# Altium PCB MSE312_SIMRACER.PcbDoc
Units mm, origin at the board's own origin, x right, y up, seen from the top; angles counter-clockwise.
Board outline 100 x 80 mm, 2 copper layers (Top Layer, Bottom Layer); 42 components, 49 nets, 186 pads, 23 vias.
Unrouted connection lines stored in the file: 2.
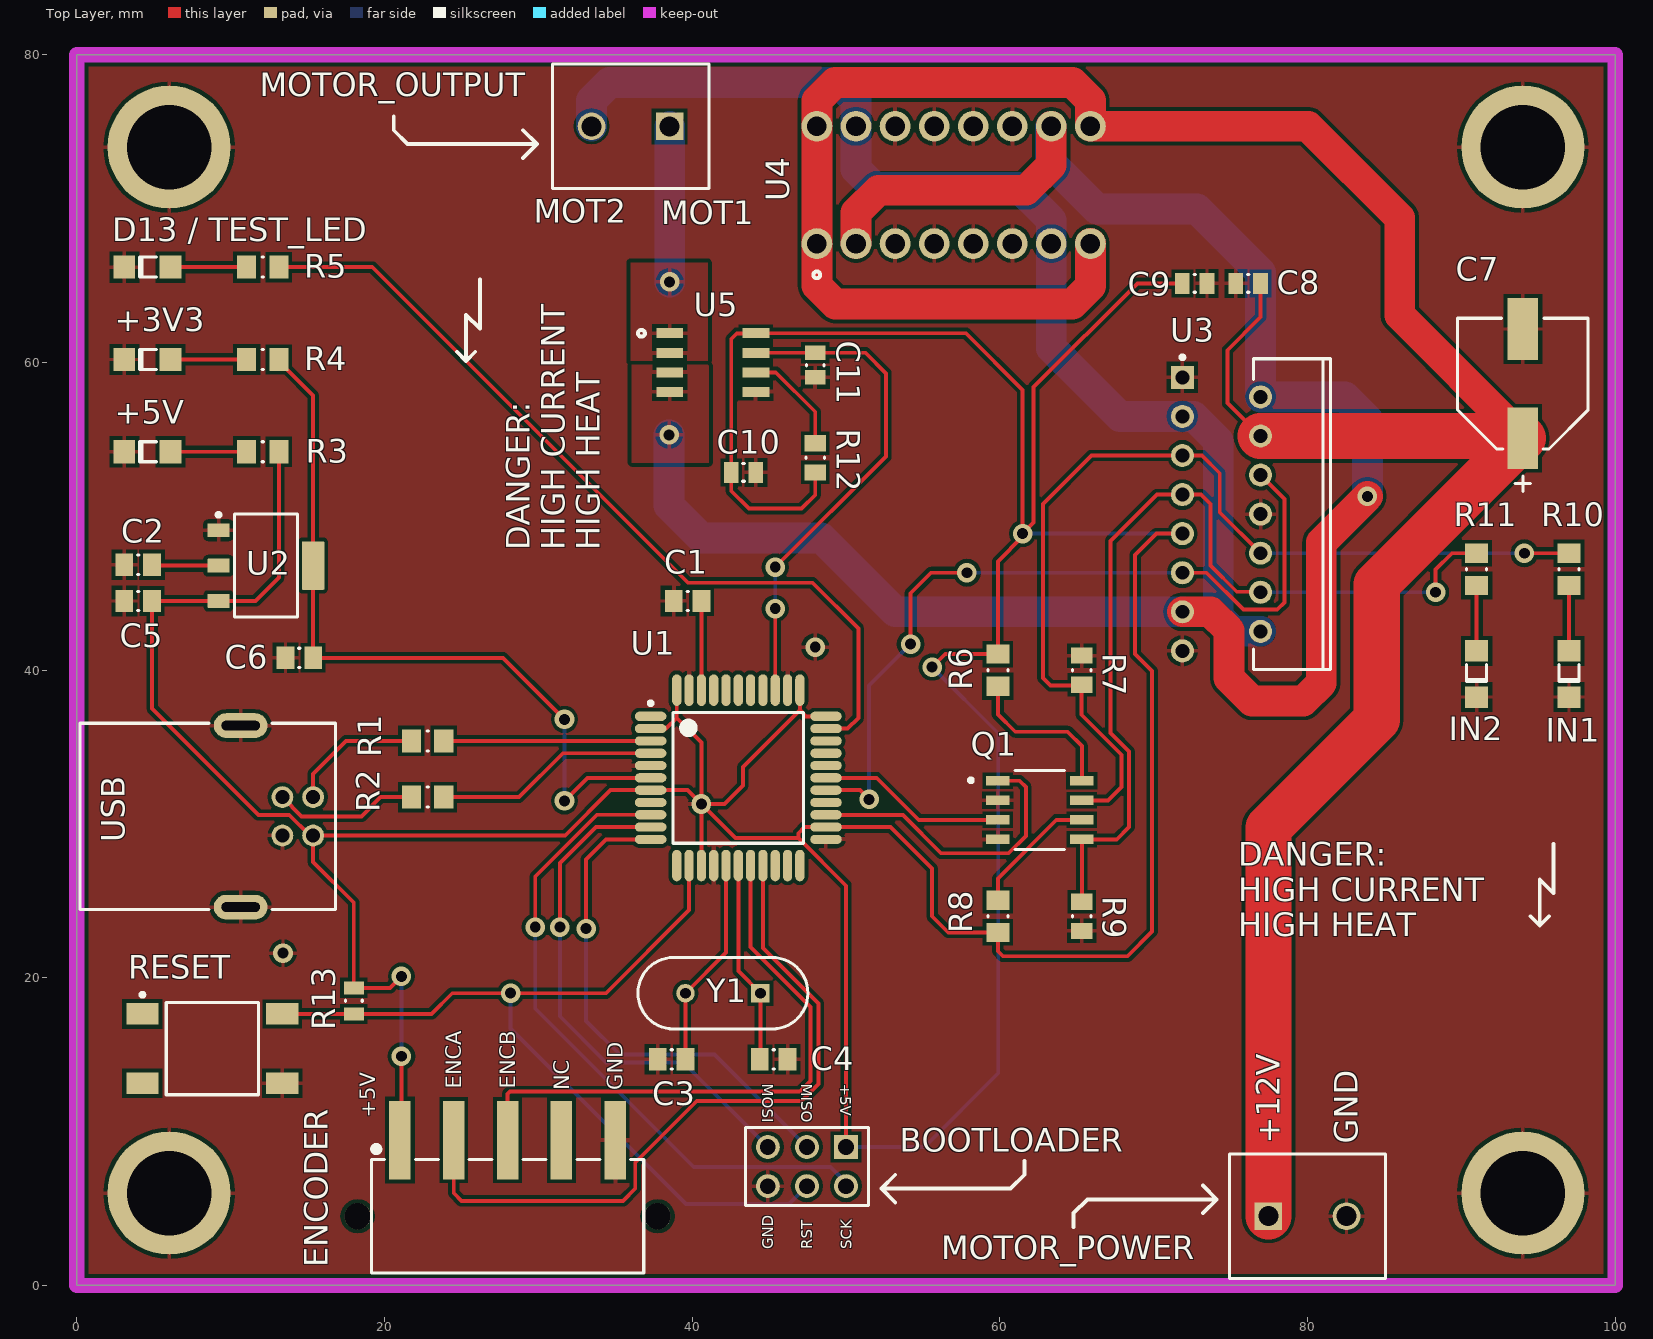
[diagram p0: Top Layer view]
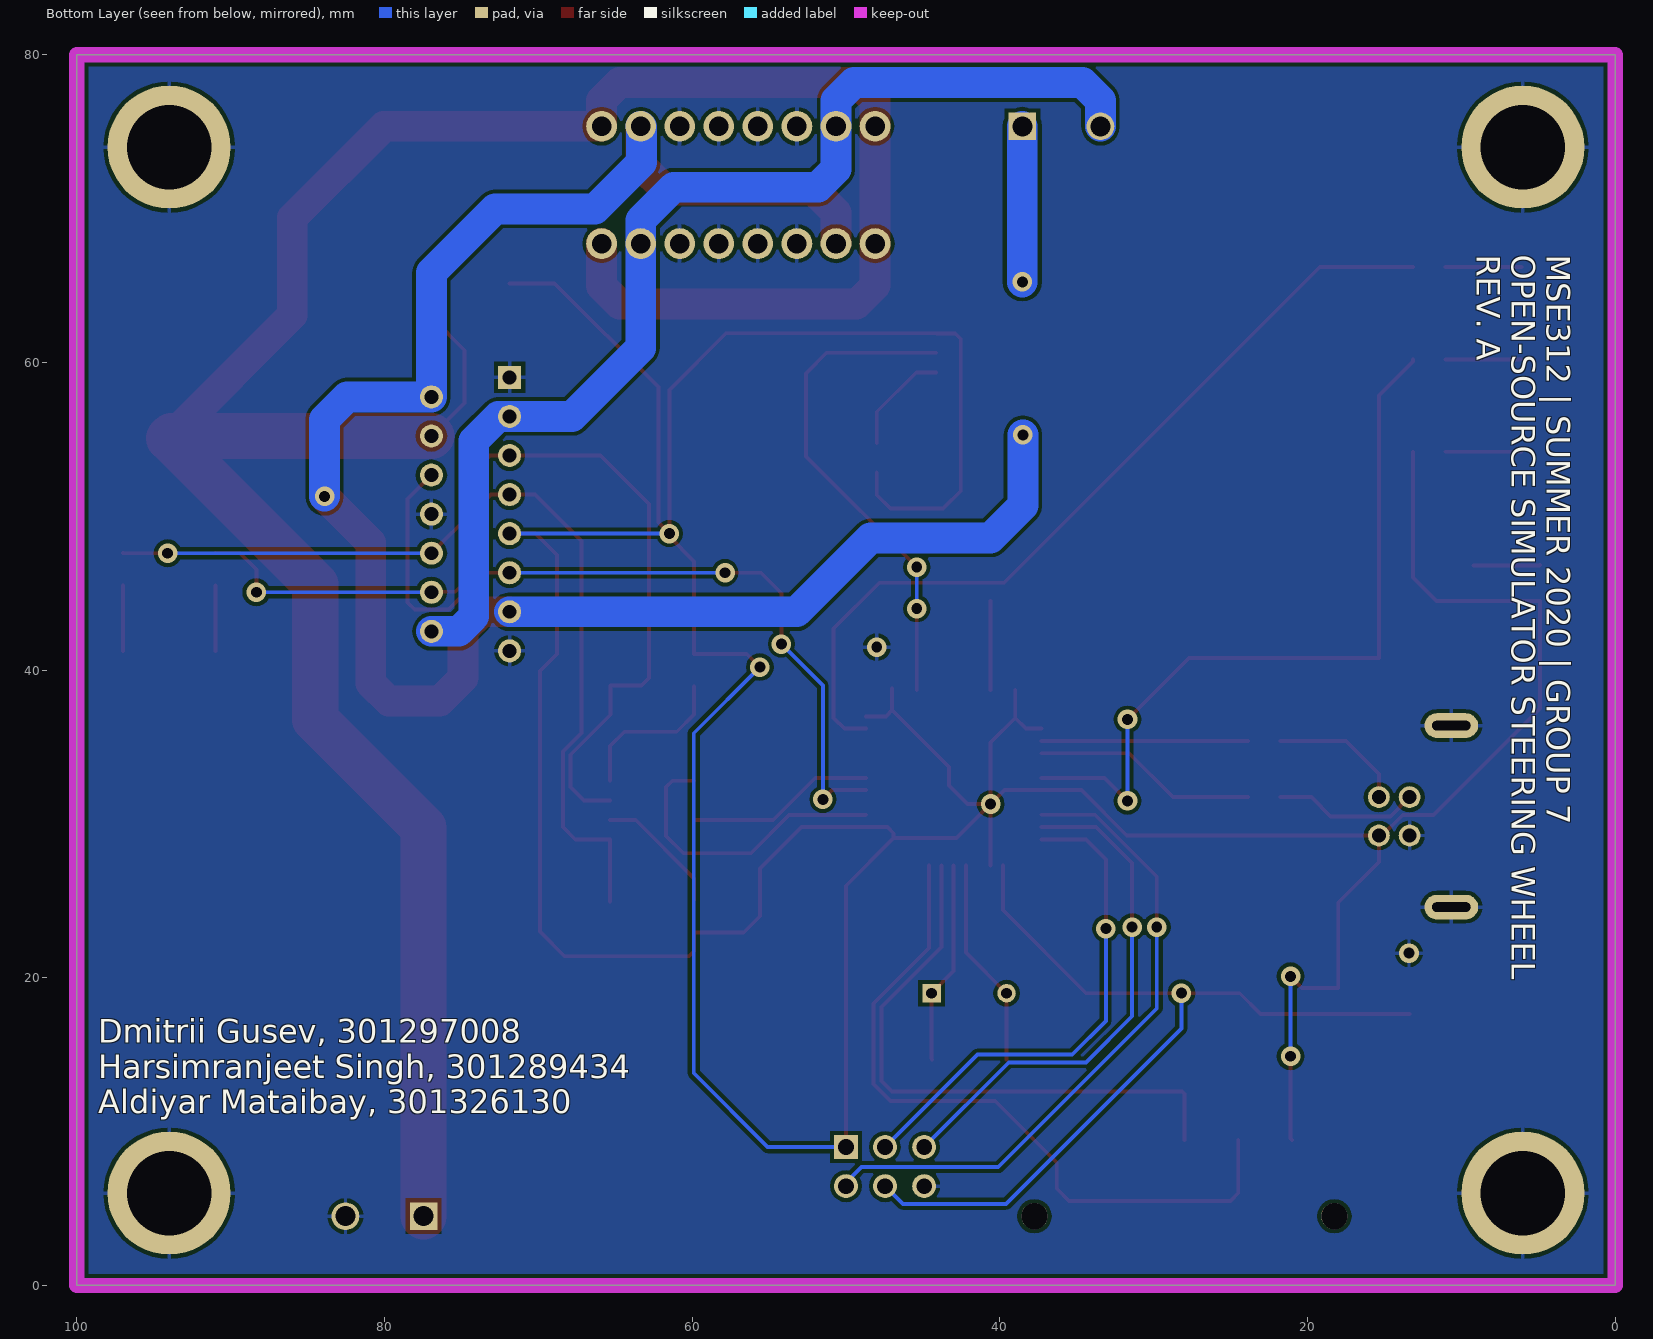
[diagram p1: Bottom Layer view, seen from below]

## Layer stack, top to bottom
Top Solder: solder mask 0.0102, Solder Resist, Dk 3.5
Top Layer: signal copper 0.0356
Dielectric 1: dielectric 0.32, FR-4, Dk 4.8
Bottom Layer: signal copper 0.0356
Bottom Solder: solder mask 0.0102, Solder Resist, Dk 3.5

## Board outline
0,0 100,0 100,80 0,80

## Design rules (kind name [scope] priority, off if disabled: settings)
Clearance [All] p1: gap=0.254 ignorepadtopadclearanceinfootprint=FALSE except(0: Arc-Hole Track-Hole SMDPad-Hole THPad-Hole Via-Hole Fill-Hole Poly-Hole Region-Hole Text-Hole)
ComponentClearance [All] p1: gap=0 collisioncheckmode=3 verticalgap=0 showdistances=FALSE
PolygonConnect [All] p1: connectstyle=Relief reliefconductorwidth=0.254 reliefentries=4 polygonreliefangle="90 Angle" airgapwidth=0.254
RoutingVias [All] p1: holewidth=0.711 width=1.27 viastyle="Through Hole" minholewidth=0.711 minwidth=1.27 maxholewidth=0.711 maxwidth=1.27
SolderMaskExpansion [All] p1: expansion=0.102
Width [All] p1: maxlimit=3 minlimit=0.127 preferedwidth=0.254 minimp=50.000000 maximp=50.000000 favimp=50.000000
29 further rules are at their usual default settings.

## Classes and differential pairs
component class MSE312_SIMRACER: +3V3 +5V BOOTLOADER C1 C2 C3 C4 C5 C6 "D13 / TEST_LED" ENCODER MOTOR_POWER Q1 R1 R2 R3 R4 R5 R6 R7 R8 R9 R13 RESET U1 U2 USB Y1
component class L298N: C7 C8 C9 C10 C11 IN1 IN2 MOTOR_OUTPUT R10 R11 R12 U3 U4 U5

## Components (designator, comment, footprint, x,y, rotation, side; value= is the part's Value field where it differs from the comment)
+3V3 "150120GS75000" 1206_A 4.585,60.2 r0 top
+5V "150120GS75000" 1206_A 4.585,54.2 r0 top
BOOTLOADER "TSW-103-08-G-D" SMTC-TSW-103-08-X-D 50,9 r180 top
C1 "1uF 6.3V 0805(2012)" CAPC0805(2012)145_N 39.7,44.5 r0 top value=1uF
C2 "1uF 6.3V 0805(2012)" CAPC0805(2012)145_N 3.985,46.85 r0 top value=1uF
C3 "22pF 16V 0805(2012)" CAPC0805(2012)100_N 38.66,14.7 r0 top value=22pF
C4 "22pF 16V 0805(2012)" CAPC0805(2012)100_N 45.3,14.7 r180 top value=22pF
C5 "10uF 25V 0805(2012)" CAPC0805(2012)145_N 3.985,44.5 r0 top value=10uF
C6 "10uF 25V 0805(2012)" CAPC0805(2012)145_N 14.46,40.8 r0 top value=10uF
C7 "EEE-FK1H101P" FP-EEE-FK1H101P-MFG 94,58.63 r270 top value=100uF
C8 "100nF 16V 0805(2012)" CAPC0805(2012)100_L 76.15,65.145 r180 top value=100nF
C9 "100nF 16V 0805(2012)" CAPC0805(2012)100_L 72.67,65.145 r180 top value=100nF
C10 "100nF 16V 0805(2012)" CAPC0805(2012)100_L 43.34,52.855 r180 top value=100nF
C11 "1nF 200V 0805(2012)" CAPC0805(2012)145_L 48,59.835 r90 top value=1nF
"D13 / TEST_LED" "150120GS75000" 1206_A 4.585,66.2 r0 top
ENCODER "691508110305" 691508110305 28,4.5 r0 top
IN1 "150120BS75000" 1206_A 97,39.755 r90 top
IN2 "150120BS75000" 1206_A 91,39.755 r90 top
MOTOR_OUTPUT "1729128" PHOE-1729128-2_V 36,75.355 r180 top
MOTOR_POWER "1729128" PHOE-1729128-2_V 80,4.5 r0 top
Q1 "MOCD213R2M" FP-751DZ-MFG 62.6,30.905 r0 top
R1 "22R 5% 0805(2012)" RESC0805(2012)_M 22.8,35.4 r0 top value="22.00 Ohm"
R2 "22R 5% 0805(2012)" RESC0805(2012)_M 22.8,31.75 r0 top value="22.00 Ohm"
R3 "1K 1% 0805(2012)" RESC0805(2012)_M 12.085,54.2 r0 top value="1000.00 Ohm"
R4 "1K 1% 0805(2012)" RESC0805(2012)_M 12.085,60.2 r0 top value="1000.00 Ohm"
R5 "1K 1% 0805(2012)" RESC0805(2012)_M 12.085,66.2 r0 top value="1000.00 Ohm"
R6 "1K 1% 0805(2012)" RESC0805(2012)_M 59.87,40 r90 top value="1000.00 Ohm"
R7 "4K7 5% 0805(2012)" RESC0805(2012)_N 65.33,40 r270 top value="4700.00 Ohm"
R8 "1K 1% 0805(2012)" RESC0805(2012)_M 59.87,24 r270 top value="1000.00 Ohm"
R9 "4K7 5% 0805(2012)" RESC0805(2012)_N 65.33,24 r90 top value="4700.00 Ohm"
R10 "1K 1% 0805(2012)" RESC0805(2012)_M 97,46.555 r90 top value="1000.00 Ohm"
R11 "1K 1% 0805(2012)" RESC0805(2012)_M 91,46.555 r90 top value="1000.00 Ohm"
R12 "4K7 5% 0805(2012)" RESC0805(2012)_N 48,53.805 r270 top value="4700.00 Ohm"
R13 "10K 5% 0805(2012)" RESC0805(2012)_L 18,18.5 r90 top value="10000.00 Ohm"
RESET "FSM4JSMATR" TECO-FSM4JSMATR_V 8.81,15.4 r90 top
U1 "ATmega32U4-AU" 44ML_M 43,33 r0 top
U2 "LM1117MP-3.3/NOPB" DCY0004A_L 12.285,46.8 r0 top
U3 "L298N" STM-FM-15 74.41,50.145 r0 top
U4 "L6210" L6210 57,71.545 r90 top
U5 "ACS723" ACS723 41.34,60 r0 top
USB "61410416121R" 61410416121R 8.5,30.5 r270 top
Y1 "49S/18PF" JPY-49S-18PF 42,19 r180 top

## Footprints (in the part's own frame and the unit in brackets; to place one, negate y for a bottom-side part, rotate by r counter-clockwise, add the part's x,y. Pads: shape width x height; smd on the part's side, far side on the other; paste and mask are expansions set on the pad)
44ML_M [mm] "Thin QFP, 44-Leads, Body 10x10mm, Pitch 0.8mm, IPC Low Density"
  oval 2.05x0.6 smd: 1(-5.7,4) 2(-5.7,3.2) 3(-5.7,2.4) 4(-5.7,1.6) 5(-5.7,0.8) 6(-5.7,0) 7(-5.7,-0.8) 8(-5.7,-1.6) 9(-5.7,-2.4) 10(-5.7,-3.2) 11(-5.7,-4) 23(5.7,-4) 24(5.7,-3.2) 25(5.7,-2.4) 26(5.7,-1.6) 27(5.7,-0.8) 28(5.7,0) 29(5.7,0.8) 30(5.7,1.6) 31(5.7,2.4) 32(5.7,3.2) 33(5.7,4)
  oval 0.6x2.05 smd: 12(-4,-5.7) 13(-3.2,-5.7) 14(-2.4,-5.7) 15(-1.6,-5.7) 16(-0.8,-5.7) 17(0,-5.7) 18(0.8,-5.7) 19(1.6,-5.7) 20(2.4,-5.7) 21(3.2,-5.7) 22(4,-5.7) 34(4,5.7) 35(3.2,5.7) 36(2.4,5.7) 37(1.6,5.7) 38(0.8,5.7) 39(0,5.7) 40(-0.8,5.7) 41(-1.6,5.7) 42(-2.4,5.7) 43(-3.2,5.7) 44(-4,5.7)
  silkscreen extent -5.82,-4.25 4.25,4.97, body extent -5,-5 5,5, height 1.2
1206_A [mm] "Chip LED, 2-Leads, Body 3.2x1.6mm, IPC Medium Density"
  rect 1.4x1.5 smd: 1(-1.5,0) 2(1.5,0)
  silkscreen extent -0.5,-0.66 0.6,0.65, body extent -1.6,-0.8 1.6,0.8, height 0.68
61410416121R [mm] "USB Type B Horizontal THR"
  round 1.42 hole 0.92: 1(1.25,6.86) 2(-1.25,6.86) 3(-1.25,4.86) 4(1.25,4.86)
  oval 1.6x3.5 hole 0.6 slot 2.5 at 90 deg: Shell(-5.9,2.15) Shell(5.9,2.15)
  silkscreen extent -6.05,-8.3 6.05,8.3, body extent -6.2,-8.3 6.2,8.3, height 11.05
691508110305 [mm] "WR-TBL Terminal block - serie 5081 3,50mm - SMT - Horizontal entry with rising clamp - 05p"
  rect 1.4x5.1 smd: 1(-7,4.95) 2(-3.5,4.95) 3(0,4.95) 4(3.5,4.95) 5(7,4.95)
  round 1.7 hole 1.7 unplated: M1(-9.75,0) M2(9.75,0)
  silkscreen extent -8.85,-3.7 8.85,4.51, body extent -10.42,-3.7 10.42,7.2, height 11.25
ACS723 [mm]
  rect 1.75x0.65 smd: 1(-2.8,1.905) 2(-2.8,0.635) 3(-2.8,-0.635) 4(-2.8,-1.905) 5(2.8,-1.905) 6(2.8,-0.635) 7(2.8,0.635) 8(2.8,1.905)
  body extent -3.1,-2.5 3.1,2.5, height 2
CAPC0805(2012)100_L [mm] "Chip Capacitor, Body 2.0x1.2mm, Height 1.0mm, IPC High Density"
  rect 0.95x1.35 smd: 1(-0.8,0) 2(0.8,0)
  silkscreen extent -0.05,-0.58 0.05,0.58, body extent -1.1,-0.72 1.1,0.72, height 1
CAPC0805(2012)100_N [mm] "Chip Capacitor, Body 2.0x1.2mm, Height 1.0mm, IPC Medium Density"
  rect 1.15x1.45 smd: 1(-0.9,0) 2(0.9,0)
  silkscreen extent -0.05,-0.62 0.05,0.63, body extent -1.1,-0.72 1.1,0.73, height 1
CAPC0805(2012)145_L [mm] "Chip Capacitor, Body 2.0x1.2mm, Height 1.45mm, IPC High Density"
  rect 0.95x1.35 smd: 1(-0.8,0) 2(0.8,0)
  silkscreen extent -0.05,-0.58 0.05,0.58, body extent -1.1,-0.72 1.1,0.72, height 1.45
CAPC0805(2012)145_N [mm] "Chip Capacitor, Body 2.0x1.2mm, Height 1.45mm, IPC Medium Density"
  rect 1.15x1.45 smd: 1(-0.9,0) 2(0.9,0)
  silkscreen extent -0.05,-0.62 0.05,0.63, body extent -1.1,-0.72 1.1,0.73, height 1.45
DCY0004A_L [mm] "SOT223, 4-Leads, Body 6.7x3.7mm, Pitch 2.3mm, IPC High Density"
  rrect11% 1.45x0.9 smd: 1(-3.075,2.3) 2(-3.075,0) 3(-3.075,-2.3)
  rrect7% 1.45x3.15 smd: 4(3.075,0)
  silkscreen extent -3.2,-3.35 2.05,3.42, body extent -3.5,-3.25 3.5,3.25, height 1.62
FP-751DZ-MFG [mm]
  rect 1.52x0.61 smd paste+0 mask+0: 1(-2.73,1.905) 2(-2.73,0.635) 3(-2.73,-0.635) 4(-2.73,-1.905) 5(2.73,-1.905) 6(2.73,-0.635) 7(2.73,0.635) 8(2.73,1.905)
  silkscreen extent -4.6,-2.57 1.6,2.57, body extent -3.59,-2.67 3.59,2.67, height 0.25
FP-EEE-FK1H101P-MFG [mm]
  rect 4x2 smd paste+0 mask+0: 1(-3.55,0) 2(3.55,0)
  silkscreen extent -4.25,-4.25 7,4.25, body extent -5.8,-4.5 5.8,4.5, height 0.25
JPY-49S-18PF [mm] "THD, 2-Leads, Body 11.05x4.65mm, Pitch 4.88mm"
  rect 1.2x1.2 hole 0.7: 1(-2.44,0)
  round 1.2 hole 0.7: 2(2.44,0)
  silkscreen extent -5.53,-2.32 5.53,2.32, body extent -5.52,-2.32 5.53,2.33, height 3.5
L6210 [mm] "SHOTTKY DIODE 4-CHANNEL BRIDGE"
  round 2 hole 1.27: 1(-3.81,8.89) 2(-3.81,6.35) 3(-3.81,3.81) 4(-3.81,1.27) 5(-3.81,-1.27) 6(-3.81,-3.81) 7(-3.81,-6.35) 8(-3.81,-8.89) 9(3.81,-8.89) 10(3.81,-6.35) 11(3.81,-3.81) 12(3.81,-1.27) 13(3.81,1.27) 14(3.81,3.81) 15(3.81,6.35) 16(3.81,8.89)
  body extent -4.13,-9.53 3.87,9.48, height 4
PHOE-1729128-2_V [mm] "Receptacle, 2-Leads, Body 8.1x10.16mm, Pitch 5.08mm"
  rect 1.8x1.8 hole 1.3: 1(-2.54,0)
  round 1.8 hole 1.3: 2(2.54,0)
  silkscreen extent -5.08,-4.05 5.08,4.05, body extent -5.65,-4.05 5.08,4.05, height 10.01
RESC0805(2012)_L [mm] "Chip Resistor, Body 2.0x1.3mm, IPC High Density"
  rect 0.85x1.3 smd: 1(-0.85,0) 2(0.85,0)
  silkscreen extent -0.05,-0.55 0.05,0.55, body extent -1.1,-0.67 1.1,0.68, height 0.7
RESC0805(2012)_M [mm] "Chip Resistor, Body 2.0x1.3mm, IPC Low Density"
  rect 1.25x1.5 smd: 1(-1.05,0) 2(1.05,0)
  silkscreen extent -0.05,-0.65 0.05,0.65, body extent -1.1,-0.67 1.1,0.67, height 0.7
RESC0805(2012)_N [mm] "Chip Resistor, Body 2.0x1.3mm, IPC Medium Density"
  rect 1.05x1.4 smd: 1(-0.95,0) 2(0.95,0)
  silkscreen extent -0.05,-0.6 0.05,0.6, body extent -1.1,-0.67 1.1,0.68, height 0.7
SMTC-TSW-103-08-X-D [mm] ".025 SQ Post Terminal Strip Assembly, 2x3 Pins, Vertical, 2.54mm Pitch, Male"
  rect 1.55x1.55 hole 1.02: 1(0,0)
  round 1.55 hole 1.02: 2(0,2.54) 3(2.54,0) 4(2.54,2.54) 5(5.08,0) 6(5.08,2.54)
  silkscreen extent -1.46,-1.27 6.54,3.81, body extent -1.27,-1.27 6.35,3.81, height 8.38
STM-FM-15 [mm] "FM, 15-Leads, Body 20.2x5mm, Pitch 1.27mm"
  rect 1.5x1.5 hole 0.9: 1(-2.54,8.89)
  round 1.5 hole 0.9: 2(2.54,7.62) 3(-2.54,6.35) 4(2.54,5.08) 5(-2.54,3.81) 6(2.54,2.54) 7(-2.54,1.27) 8(2.54,0) 9(-2.54,-1.27) 10(2.54,-2.54) 11(-2.54,-3.81) 12(2.54,-5.08) 13(-2.54,-6.35) 14(2.54,-7.62) 15(-2.54,-8.89)
  silkscreen extent -2.66,-10.1 7.09,10.31, body extent -2.8,-10.1 7.09,10.1, height 21
TECO-FSM4JSMATR_V [mm] "SMD, 4-Leads, Body 6x6mm, Pitch 4.5mm"
  rect 1.4x2.1 smd: 1(2.25,4.55) 2(2.25,-4.55) 3(-2.25,4.55) 4(-2.25,-4.55)
  silkscreen extent -3,-3 3.62,4.67, body extent -3,-5 3,5, height 5.08

## Part data
+3V3 +5V "D13 / TEST_LED": library part CMP-1426-00014-1, "SMD mono-color Chip LED, WL-SMCW, Green", Color=Green, Manufacturer="Wuerth Elektronik", ComponentLink1Description="Manufacturer URL", ComponentLink1URL=http://www.we-online.com, ComponentLink2Description=Datasheet, ComponentLink2URL=http://katalog.we-online.com/led/datasheet/150120GS75000.pdf, PackageReference=1206_A, PartNumber=150120GS75000
BOOTLOADER: library part CMP-1024-00338-1, Manufacturer=Samtec, Temperature Range="-55 to 125 degC", ComponentLink1Description="Manufacturer URL", ComponentLink1URL=http://www.samtec.com, ComponentLink2Description=Datasheet, ComponentLink2URL=http://www.samtec.com/documents/webfiles/pdf/TSW_TH.PDF, ComponentLink3Description="Package Specification", ComponentLink3URL=http://www.samtec.com/documents/webfiles/cpdf/TSW-XXX-XX-XXX-X-XX-XXX-MKT.pdf, DatasheetVersion=F-214, Mounting Technology=Through-hole, Orientation=Vertical, PackageDescription=".025[0.64] SQ. Post Terminal Strip Assembly", PackageReference=TSW-103-08-X-D, PackageVersion="DM, 8/1988", PartNumber=TSW-103-08-G-D, Pitch="2.54 mm", RoHS=True
C1 C2: library part CMP-1036-04731-1, "CAP 1uF 6.3V ±10% 0805 (2012 Metric) Thickness 1.45mm SMD", Case-EIA=0805, Case-Metric=2012, Rated Voltage="6.3 V", Tolerance=±10%, Max Thickness="1.45 mm", Technology=SMT
C3 C4: library part CMP-1036-01215-1, "CAP 22pF 16V ±0.5pF 0805 (2012 Metric) Thickness 1mm SMD", Case-EIA=0805, Case-Metric=2012, Rated Voltage="16 V", Tolerance=±0.5pF, Max Thickness="1 mm", Technology=SMT
C5 C6: library part CMP-1036-04932-1, "CAP 10uF 25V ±10% 0805 (2012 Metric) Thickness 1.45mm SMD", Case-EIA=0805, Case-Metric=2012, Rated Voltage="25 V", Tolerance=±10%, Max Thickness="1.45 mm", Technology=SMT
C7: library part CMP-05427-000005-1, "CAP ALUM 100UF 20% 50V SMD", Capacitance=100uF, Leakage Current=50uA, Manufacturer="Panasonic Electronic Components", Package=0, Ripple Current=350mA, Temperature="-55°C to +105°C", Temperature Range High=+105°C, Temperature Range Low=-55°C, Tolerance=20%, Voltage Rating=50V, Automotive=Yes, Automotive Grade="Grade 2", Category=Cap, ComponentLink2Description=Datasheet, ComponentLink2URL=https://industrial.panasonic.com/cdbs/www-data/pdf/RDE0000/ABA0000C1181.pdf, Device Class L1="Passive Components", Device Class L2=Capacitors, Device Class L3="Aluminum Electrolytic Capacitors", Digikey Description="CAP ALUM 100UF 20% 50V SMD", Dissipation Factor=10%, Esr=0.34O, Height=10.5mm, Lead Free=Yes, Life=2000Hours, Manufacturer Part Number=EEE-FK1H101P, Material=Aluminum, Mouser Description="Cap Aluminum Lytic 100uF 50V 20% (8 X 10.2mm) SMD 350mA 2000h 105C Automotive T/R", Octopart=https://octopart.com/eeefk1h101p-panasonic-4642841, RoHS=TRUE
C8 C9 C10: library part CMP-1036-04400-1, "CAP 100nF 16V ±5% 0805 (2012 Metric) Thickness 1mm SMD", Case-EIA=0805, Case-Metric=2012, Rated Voltage="16 V", Tolerance=±5%, Max Thickness="1 mm", Technology=SMT
C11: library part CMP-1036-02999-1, "CAP 1nF 200V ±10% 0805 (2012 Metric) Thickness 1.45mm SMD", Case-EIA=0805, Case-Metric=2012, Rated Voltage="200 V", Tolerance=±10%, Max Thickness="1.45 mm", Technology=SMT
ENCODER: library part CMP-1502-02493-1, "Serie 5081 - 3.50 mm Horizontal Entry SMT with Rising Cage Clamp WR-TBL, 5 pin", Manufacturer="Wurth Elektronik", Operating Temperature=-40to130degC, Datasheet URL=http://katalog.we-online.de/em/datasheet/6915081103xx.pdf, Manufacturer URL=http://www.we-online.de, Mounting Technology=SMT, Package Reference=691508110305, Packaging=TapeandReelwithCap, Part Number=691508110305, Pin Number=5, Pitch=3.50mm, Publisher=WurthElektronik
IN1 IN2: library part CMP-1426-00015-1, "SMD mono-color Chip LED, WL-SMCW, Blue", Color=Blue, Manufacturer="Wuerth Elektronik", ComponentLink1Description="Manufacturer URL", ComponentLink1URL=http://www.we-online.com, ComponentLink2Description=Datasheet, ComponentLink2URL=http://katalog.we-online.com/led/datasheet/150120BS75000.pdf, PackageReference=1206_A, PartNumber=150120BS75000
MOTOR_OUTPUT MOTOR_POWER: library part CMP-2000-05815-1, "PCB Terminal Block, 13.5 A, 400 V, 2-Pin THD, RoHS, Bulk", Current Rating=13500mA, Manufacturer="Phoenix Contact", Package Description="2-Pin Through Hole Device, Body 8.1 x 10.16 mm, Pitch 5.08 mm", Package Reference=1729128-2, Package Version=03/2015, Voltage Rating=400V, Datasheet URL=https://datasheet.ciiva.com/16046/1729128-16046181.pdf, Datasheet Version=12/2013, Manufacturer URL=http://www.phoenixcontact.com/, Mounting Technology=ThroughHole, No. of Positions=2, No. of Rows=1, Orientation=Horizontal, Package URL=https://www.phoenixcontact.com/online/portal/pi/pxc/product_detail_page/!ut/p/b1/3VdJjqNKFDxLH8AFycySyWY2ozFsEPOMMQaDOX1XedGL_1Vdm5YXJleknhSKeBkvI6EA8ncAo3AYoDhBQGco6KN7VURTdemj9us_IEKEZo_YHiPAEWEFmDGOHMORkqKYCORBZxgL7ZoaZYcbFFUZ3fqxSY6GOuxydWUuHqz1ynmMFygu583Bob0Ewr6Sd_l-5m-kAueHiB0jpRwZwe58wwtkpxtMYd_LmGcDRU02dRNEyWt6Y2ti5pSyJ_reIkzIulrqApdnbT11V5jnCKbYNCvhEM1MCpPByat_X379-iThf08CI5GfOPqfBeS3BRoBOdD55AKVv0iLwCMq-2BrzXWSGRH7pUGD9uwXQjiph3xL0DKQwdGa0JImiIOmBNOestqgwTHSSs2oOep-78apyXQBvNi8ZLaFjvjWvcaUEBu0MC6Wbe-d6mB0FAebo2lUWinqYaZs5DAYzV0RP9yitUjnGJ0iI9xhZkT42OCQNUJJhkgWINNQLP2JFP6OpMg3JCVg70jqHT0lvKOnhHf0lPuOnnLf0VPuWx6_dxwUIvwk5WMkT0kLL1mh61l2yZVSzG3pYV_bqo-mj6uMKwKwdnnW8Jh5RTOJzMOA5c-eJDaZQw4mTMPH02PvS_ZAqNVjVTo2WyYLkwH_KU1mmmG5kjRhDqPXLwwVHvVOjCM60-fpXvTDfMGW1PVFVS1r4e4yVDk4ZdNbkUHvqPqQSeian4UD39fNKmachqdJ1NJbyk8rXT9mXTvPk3oE5meulKGgiruPJek-4I9hTT6G8ZLOyRSm2RRVbThERQad5OS28hdt4YW4vG0stgYYzsWsK4_7y6DZMjJSCqri1kyiZR5vD7pwIrNR7QwPHTcLTI5qT7eRlpHrdGiupYlqQDJ7zy_CND8fWWBoLRXxk1RVcXiBQwbTD4Xi7KL-FuO94t9xaqweXzH, Packing=Bulk, PartNumber=1729128, Pitch=5.08mm, RoHS=TRUE
Q1: library part CMP-07144-000004-1, "OPTOISO 2.5KV 2CH TRANS 8SOIC", Ambient Temperature Range High=+100°C, Ambient Temperature Range Low=-40°C, Collector Emitter Voltage=70V, Emiiter Collector Voltage=7V, Forward Current=10mA, Forward Voltage=1.15V, Isolation Voltage=2500Vrms, Manufacturer="ON Semiconductor", Max Junction Temp=+125°C, Min Current Transfer Ratio=100%, Package=751DZ, Power Dissipation=240mW, Reverse Voltage=6V, Temperature="-40°C to +100°C", Automotive=No, Category=Trans, ComponentLink2Description=Datasheet, ComponentLink2URL=https://www.onsemi.com/pub/Collateral/MOCD217M-D.PDF, Device Class L1=Optoelectronics, Device Class L2=Optocouplers, Device Class L3=unset, Digikey Description="OPTOISO 2.5KV 2CH TRANS 8SOIC", Footprint Url=https://www.onsemi.com/pub/Collateral/751DZ.PDF, Height=3.63mm, Lead Free=Yes, Manufacturer Part Number=MOCD213R2M, Mouser Description="Optocoupler DC-IN 2-Channel Transistor DC-Output 8-Pin SOIC N T/R", Octopart=https://octopart.com/mocd213r2m-on+semiconductor-84330505, PartId=1, RoHS=TRUE, Standoff Height=0.08mm, Temperature Range High=+100°C, Temperature Range Low=-40°C, Turn Off Delay Time=5.7us, Turn On Delay Time=7.5us
R1 R2: library part CMP-1013-00034-1, "22R 0.125W 5% 0805 (2012 Metric)  SMD", Case-EIA=0805, Case-Metric=2012, Power="0.125 W", Tolerance="5 %", Technology=SMT
R3 R4 R5 R6 R8 R10 R11: library part CMP-1013-00510-1, "1K 0.125W 1% 0805 (2012 Metric)  SMD", Case-EIA=0805, Case-Metric=2012, Power="0.125 W", Tolerance="1 %", Technology=SMT
R7 R9 R12: library part CMP-1013-00090-1, "4K7 0.125W 5% 0805 (2012 Metric)  SMD", Case-EIA=0805, Case-Metric=2012, Power="0.125 W", Tolerance="5 %", Technology=SMT
R13: library part CMP-1013-00098-1, "10K 0.125W 5% 0805 (2012 Metric)  SMD", Case-EIA=0805, Case-Metric=2012, Power="0.125 W", Tolerance="5 %", Technology=SMT
RESET: library part CMP-2000-07486-1, "Micro Miniature Push Button Switch FSM JSM, 50 mA, -35 to 85 degC, 4-Pin SMD, RoHS, Tape and Reel", Capacitance=0f, Case\/Package=SMD/SMT, Contact Current Rating=50mA, Contact Resistance=100mOhm, Manufacturer="TE Connectivity", Max Operating Temperature=85degC, Max Voltage Rating (DC)=12V, Min Operating Temperature=-35degC, Operating Force=160gf, Package Description="4-Pin Surface Mount Device, Body 6 x 6 mm, Pitch 4.5 mm", Package Quantity=1200, Voltage Rating (DC)=24V, Actuator Length=0.055inch, Actuator Material=Polyamide, Contact Material=CopperAlloy, Contact Plating=Silver, Current Rating=50mA, Datasheet URL=http://www.te.com/commerce/DocumentDelivery/DDEController?Action=showdoc&DocId=Customer+Drawing%7F2-1437565-7%7FV%7Fpdf%7FEnglish%7FENG_CD_2-1437565-7_V.pdf%7F4-1437565-2, Datasheet Version="Rev. V, 02/2015", Electrical Life=100000Cycles, Illumination Type=Illuminated, Manufacturer URL=http://www.te.com/, Mechanical Life=100000Cycles, Mount=SurfaceMount, Mounting Technology=SurfaceMount, Orientation=Straight, Package Reference=FSM4JSMATR, Packaging=TapeandReel, REACH SVHC=Unknown, RoHSCompliant=true, Switch Travel=0.25mm, Termination=GullWing, Throw Configuration=SPST
U1: library part CMP-0095-00285-2, "8-bit AVR Microcontroller, 2.7-5.5V, 16MHz, 32KB Flash, 1KB EEPROM, 2.5KB SRAM, USB Controller, 44-pin TQFP, Industrial Grade (-40°C to 85°C), Ext Osc", ComponentLink1Description="Manufacturer URL", ComponentLink1URL=http://www.atmel.com/, ComponentLink2Description="ATmega16U4/32U4 Datasheet", ComponentLink2URL=http://www.atmel.com/dyn/resources/prod_documents/doc7766.pdf, ComponentLink3Description="ATmega16U4 ATmega32U4 Summary", ComponentLink3URL=http://www.atmel.com/dyn/resources/prod_documents/7766S.pdf, DatasheetVersion="revF, Nov-2010", PackageDescription="44-Pin Plastic Thin Quad Flat Pack, 10 x 10 x 1.0 mm Body, 0.8 mm Pitch (TQFP)", PackageReference=44ML, PackageVersion="rev.G, Jul-2007", RevisionNote="DatasheetVersion updated. URLs added."
U2: library part CMP-0062-01638-4, "800mA Low-Dropout Linear Regulator, 4-pin SOT-223, Pb-Free", Manufacturer="Texas Instruments", PackageTopMarking=XYTT*N05A, PowerWise=N, Code_IPC=SOT223-4, Code_JEDEC=TO-261-AA, ComponentLink1Description="Datasheet URL", ComponentLink1URL=http://www.ti.com/general/docs/lit/getliterature.tsp?genericPartNumber=LM1117-N&fileType=pdf, CompType="LDO IC", High-Reliability=Y, PackageDescription="Molded SOT-223, 6.50 x 3.56 x 1.6mm Body, 4 Lead, 2.3mm Pitch", PackageReference=DCY0004A, PartNumber=LM1117MP-3.3/NOPB, PinCount=4, RoHS=Y
U3: library part CMP-2000-06526-1, "Dual Full-Bridge Driver, 4.8 to 46 V, -40 to 150 degC, 15-Pin FM (MW 15L), RoHS, Tube", Driver Case Style=Multiwatt, Manufacturer=STMicroelectronics, Operating Temperature Max=130°C, Operating Temperature Min=-25°C, Output Current=2A, Output Voltage=46V, Package Description="15-Pin Flange Mount, Body 5 x 19.6 mm, Pitch 1.27 mm", Package Reference=FM-15, PartNumber=L298, Supply Voltage Max=7V, Supply Voltage Min=4.5V, Automotive Qualification Standard=-, Datasheet URL=https://datasheet.ciiva.com/15109/getdatasheetpartid-50682-15109332.pdf, Datasheet Version=01/2000, Manufacturer URL=http://www.st.com/, Motor Type=FullBridge, Mounting Technology=ThroughHole, MSL=-, No. of Outputs=4Outputs, No. of Pins=15Pins, Packaging=Each, Product Range=-, SVHC=NoSVHC(17-Dec-2015)
USB: library part CMP-1502-03245-1, "USB 2.0 Type B Receptacle WR-COM, Horizontal, SMT", Contact Resistance=30mOhm, Manufacturer="Wurth Elektronik", Operating Temperature=-55to85degC, Rated Current=1.5A, Working Voltage=30VAC, Connector Type=USB2.0TypeB, Datasheet URL=https://katalog.we-online.de/em/datasheet/61410416121R.pdf, Gender=Receptacle, Manufacturer URL=http://www.we-online.de, Mounting Technology=SMT, Orientation=Horizontal, Package Reference=61410416121R, Packaging=TapeandReel, Part Number=61410416121R, Publisher=WurthElektronik
Y1: library part CMP-2100-03581-1, "Crystal, 16 MHz, 18 pF, -20 to 70 degC, 2-Pin THD", Manufacturer="Shenzhen Jingpengyuan", Package Description="2-Pin Through Hole Device, Body 11.05 x 4.65 mm, Pitch 4.88 mm", Package Reference=49S-18PF, Datasheet URL=http://datasheet.octopart.com/49S-18PF-Xinhunjing-datasheet-30677139.pdf, Datasheet Version=41852.0, Manufacturer URL=http://www.chjiahui.com/

## Free pads (board coordinates)
  round 8 hole 5.5: 1(6,74) 2(94,74) 3(6,6) 4(94,6)

## Via types
v1: diameter 1.27, hole 0.711, Top Layer to Bottom Layer, 23 vias

## Nets (pads, with @x,y where several pads share a name; then routed paths per layer and width w, separated by ;. In a path a pad name is that pad's centre, name@x,y a point inside that pad or via, vN(x,y) a via of type N, cw(c..) or ccw(c..) an arc to the next point about the centre after c; other vN are vias at no path point)
+3V3: C2.2 C6.2 R4.2 U1.6 U2.2 U2.4 | length 54.2
  Top Layer w0.254: C2.2 4.935,46.8 U2.2 ; R4.2 13.135,60.075 15.36,57.85 U2.4 C6.2 27.7,40.8 v1(31.7,36.8) ; v1(31.7,31.5) 33.2,33 U1.6
  Bottom Layer w0.254: v1(31.7,31.5) v1(31.7,36.8)
+5: BOOTLOADER.1 C5.2 C9.2 C10.2 ENCODER.1 R3.2 R6.2 R8.2 R12.2 R13.2 U1.2 U1.7 U1.14 U1.24 U1.33 U1.34 U1.44 U2.3 U3.9 U5.8 USB.1 | length 337.7
  Top Layer w0.254: R3.2 13.135,46.035 11.6,44.5 U2.3 C5.2 4.885,37.515 11.813,30.587 13.805,30.587 15.142,29.25 USB.1 ; ENCODER.1 21.1,9.55 v1(21.1,14.9) ; v1(21.1,20.1) 20.35,19.35 R13.2 18,24.9 15.36,27.54 USB.1 ; U1.2 38.3,36.2 39,36.9 ; U1.44 39,36.9 ; U1.14 v1(40.6,31.3) ; U1.34@47,38.8 47,37.4 ; R12.2 48,51.4 47.1,50.5 43.7,50.5 42.54,51.66 C10.2 42.54,61.54 42.9,61.9 44.135,61.9 U5.8 57.795,61.905 61.482,58.218 v1(61.482,48.882) 62.2,49.601 62.2,58.4 68.945,65.145 C9.2 ; U1.33 47.4,37 47,37.4 ; BOOTLOADER.1 50,25.988 46.9,29.088 ; v1(55.6,40.2) 56.45,41.05 R6.2 59.87,47.07 61.482,48.682 v1(61.482,48.882) ; U3.9 70.175,48.875 68.8,47.5 68.8,41.05 69.9,39.95 69.9,23 68.3,21.4 60.2,21.4 59.87,21.73 R8.2 56.65,22.95 55.6,24 55.6,27.1 52.9,29.8 U1.24 47.3,29.8 46.9,29.4 46.9,29.088 ; USB.1 31.75,29.25 34.7,32.2 U1.7 39.7,32.2 v1(40.6,31.3) ; 39,36.9 40.6,35.3 v1(40.6,31.3) ; v1(40.6,31.3) 42.812,29.088 46.9,29.088 ; v1(40.6,31.3) 42.1,31.3 43.3,32.5 43.3,33.7 47,37.4
  Bottom Layer w0.254: USB.1 15.36,29.26 USB.1@15.4,29.3 ; v1(21.1,14.9) v1(21.1,20.1) ; BOOTLOADER.1 55.1,9 59.9,13.8 59.9,35.9 v1(55.6,40.2) ; v1(61.482,48.882) 61.488,48.888 71.858,48.888 U3.9
+12V: C7.2 C8.1 MOTOR_POWER.1 U3.4 U4.1 U4.8 U4.9 U4.16 | length 180.2
  Top Layer w0.254: U3.4 74.8,57.375 74.8,60.8 76.95,62.95 C8.1
  Top Layer w2: U4.8 65.89,64.972 64.718,63.8 49.3,63.8 48.11,64.99 U4.1 U4.16 48.11,77.028 49.282,78.2 64.718,78.2 65.89,77.028 U4.9 80.045,75.355 86,69.4 86,63.08 C7.2@93.855,55.225
  Top Layer w3: U3.4 93.855,55.225 C7.2 84.5,45.58 84.5,36.8 77.46,29.76 MOTOR_POWER.1
"A0 / CURRENT_SENSOR": C11.2 U1.36 U5.7 | length 32.6
  Top Layer w0.254: U5.7 51.265,60.635 52.6,59.3 52.6,53.9 v1(45.4,46.7) ; U1.36 v1(45.4,44)
  Bottom Layer w0.254: v1(45.4,44) v1(45.4,46.7)
A1: U1.37
A2: U1.38
A3: U1.39
A4: U1.40
A5: U1.41
CURRENT_SENSOR: U3.2 U3.13 U4.2 U4.10 U5.3 U5.4 | length 126.1
  Top Layer w2: U4.2 50.65,69.75 52.1,71.2 61.7,71.2 63.35,72.85 U4.10 ; U3.13 73.705,43.795 74.9,42.6 74.9,39.5 76.4,38 79.728,38 80.9,39.172 80.9,48.3 v1(83.9,51.3)
  Bottom Layer w2: v1(38.5,55.3) 38.5,50.7 40.6,48.6 48.4,48.6 53.205,43.795 U3.13 ; U4.10 63.3,75.305 63.3,73 66.311,69.989 72.811,69.989 76.95,65.85 U3.2 82.435,57.765 83.9,56.3 v1(83.9,51.3)
D0: U1.20
D1: U1.21
"D2 / ENC_A": ENCODER.2 U1.19 | length 47.2
  Top Layer w0.254: ENCODER.2 24.5,6 25,5.5 35.5,5.5 36.3,6.3 36.3,8 40.3,12 47.118,12 48.208,13.09 48.208,18.337 44.6,21.945 U1.19
"D3 / ENC_B": ENCODER.3 U1.18 | length 38.7
  Top Layer w0.254: ENCODER.3 28,12.451 28.149,12.6 47,12.6 47.7,13.3 47.7,18.1 43.8,22 U1.18
D4: Q1.1 U1.25 | length 19.7
  Top Layer w0.254: U1.25 48.716,30.584 53.698,30.584 56.182,28.1 60.574,28.1 61.7,29.226 61.7,32.4 61.29,32.81 Q1.1
D5: U1.31
"D6 / PWM": U1.27 U3.6 U3.11 | length 52.5
  Top Layer w0.254: U1.27 50.9,32.2 v1(51.5,31.6) ; v1(54.2,41.7) 54.2,45 55.535,46.335 v1(57.865,46.335) ; U3.11 73.447,46.335 75.848,43.934 78.034,43.934 78.5,44.4 78.5,51.135 U3.6
  Bottom Layer w0.254: v1(51.5,31.6) 51.5,39 v1(54.2,41.7) ; v1(57.865,46.335) U3.11
D7: U1.1
D8: Q1.3 U1.28 | length 12.3
  Top Layer w0.254: U1.28 52,33 54.73,30.27 Q1.3
D9: U1.29
D10: U1.30
D11: U1.12
D12: U1.26
D13: R5.2 U1.32 | length 55.6
  Top Layer w0.254: R5.2 19.2,66.2 39.716,45.684 47.816,45.684 50.8,42.7 50.8,36.9 50.106,36.206 48.706,36.206 U1.32
GND: "D13 / TEST_LED.1" +3V3.1 +5V.1 BOOTLOADER.6 C1.1 C2.1 C3.1 C4.1 C5.1 C6.1 C7.1 C8.2 C9.1 C10.1 C11.1 ENCODER.5 IN1.1 IN2.1 MOTOR_POWER.2 pad.1 pad.2 pad.3 pad.4 Q1.2 Q1.4 R7.1 R9.1 RESET.4 U1.5 U1.15 U1.23 U1.35 U1.43 U2.1 U3.1 U3.8 U3.15 U4.3 U4.4 U4.5 U4.6 U4.11 U4.12 U4.13 U4.14 U5.5 USB.4 USB.Shell
  other v1: 13.4,21.6 48,41.5
IN1: Q1.7 R7.2 R10.2 U3.5 U3.10 | length 64.3
  Top Layer w0.254: Q1.7 67.04,31.54 67.9,32.4 67.9,34.5 65.3,37.1 65.3,39.02 65.28,39 63.3,39 62.8,39.5 62.8,50.8 65.955,53.955 U3.5 73.145,53.955 74.3,52.8 74.3,50.255 U3.10 ; v1(94.1,47.6) 96.995,47.6 R10.2
  Bottom Layer w0.254: U3.10 77.495,47.605 77.5,47.6 v1(94.1,47.6)
IN2: Q1.5 R9.2 R11.2 U3.7 U3.12 | length 58.5
  Top Layer w0.254: R9.2 Q1.5 67.6,29 68.4,29.8 68.4,32 68.408,32.008 68.408,34.71 67.2,35.918 67.2,48.4 70.215,51.415 U3.7 73.085,51.415 73.7,50.8 73.7,46.8 75.4,45.1 76.915,45.1 U3.12 ; v1(88.335,45.065) 88.335,46.535 89.4,47.6 90.995,47.6 R11.2
  Bottom Layer w0.254: U3.12 v1(88.335,45.065)
MISO: BOOTLOADER.3 U1.11 | length 33
  Top Layer w0.254: v1(33.1,23.2) 33.1,27.7 34.4,29 U1.11
  Bottom Layer w0.254: v1(33.1,23.2) 33.1,17.2 35.292,15.008 41.452,15.008 BOOTLOADER.3
MOSI: BOOTLOADER.5 U1.10 | length 33.9
  Top Layer w0.254: v1(31.4,23.3) 31.4,27.463 33.737,29.8 U1.10
  Bottom Layer w0.254: v1(31.4,23.3) 31.4,17.5 34.4,14.5 39.42,14.5 BOOTLOADER.5
MOTOR_OUT1: MOTOR_OUTPUT.1 U5.1 U5.2 | length 10.1
  Bottom Layer w2: v1(38.54,65.24) MOTOR_OUTPUT.1
MOTOR_OUT2: MOTOR_OUTPUT.2 U3.3 U3.14 U4.7 U4.15 | length 74.6
  Bottom Layer w2: MOTOR_OUTPUT.2 33.46,77.028 34.632,78.2 49.478,78.2 50.65,77.028 U4.15 50.65,72.572 51.822,71.4 61.2,71.4 63.35,69.25 U4.7 63.35,60.95 67.805,56.495 U3.3 72.605,56.495 74.2,54.9 74.2,43.5 75.175,42.525 U3.14
Net+3V3_2: +3V3.2 R4.1 | length 5
  Top Layer w0.254: +3V3.2 R4.1
Net+5V_2: +5V.2 R3.1 | length 5
  Top Layer w0.254: +5V.2 R3.1
NetC1_2: C1.2 U1.42 | length 5.8
  Top Layer w0.254: U1.42 C1.2
NetC3_2: C3.2 U1.16 Y1.2 | length 13.7
  Top Layer w0.254: C3.2 Y1.2 42.2,21.64 U1.16
NetC4_2: C4.2 U1.17 Y1.1 | length 13.2
  Top Layer w0.254: U1.17 43,20.44 Y1.1 44.44,14.74 C4.2
"NetD13 / TEST_LED_2": "D13 / TEST_LED.2" R5.1 | length 5
  Top Layer w0.254: 6.085,66.2 R5.1
NetIN1_2: IN1.2 R10.1 | length 4.2
  Top Layer w0.254: IN1.2 R10.1
NetIN2_2: IN2.2 R11.1 | length 4.2
  Top Layer w0.254: IN2.2 R11.1
NetQ1_6: Q1.6 R8.1 | length 8.5
  Top Layer w0.254: R8.1 59.87,26.47 63.67,30.27 Q1.6
NetQ1_8: Q1.8 R6.1 | length 10.4
  Top Layer w0.254: R6.1 59.87,37.13 61,36 64.4,36 65.33,35.07 Q1.8
NetR1_1: R1.1 USB.2 | length 8.8
  Top Layer w0.254: USB.2 15.36,33.26 17.5,35.4 R1.1
NetR1_2: R1.2 U1.3 | length 13.5
  Top Layer w0.254: R1.2 U1.3
NetR2_1: R2.1 USB.3 | length 9.4
  Top Layer w0.254: USB.3 14.61,30.5 18.5,30.5 19.75,31.75 R2.1
NetR2_2: R2.2 U1.4 | length 14.6
  Top Layer w0.254: R2.2 28.75,31.75 31.6,34.6 U1.4
NetR12_1: R12.1 U5.6 | length 7
  Top Layer w0.254: U5.6 45.435,59.365 48,56.8 R12.1
RESET: BOOTLOADER.4 R13.1 RESET.2 U1.13 | length 58.9
  Top Layer w0.254: RESET.2 R13.1 23.05,17.65 24.4,19 v1(28.2,19) 34.4,19 39.8,24.4 U1.13
  Bottom Layer w0.254: v1(28.2,19) 28.2,16.7 39.6,5.3 46.3,5.3 BOOTLOADER.4
SCK: BOOTLOADER.2 U1.9 | length 43
  Top Layer w0.254: v1(29.8,23.3) 29.8,26.582 33.818,30.6 U1.9
  Bottom Layer w0.254: v1@29.7,23.2 v1(29.8,23.3) 29.8,18 40.1,7.7 49,7.7 50,6.7 BOOTLOADER.2
SS: U1.8
pads on no net: ENCODER.4 ENCODER.M1 ENCODER.M2 RESET.1 RESET.3 U1.22

## Polygon pours and split planes (outlines as drawn)
+5 on Top Layer "Top Layer-+5" (solid, pour order 4): 38.751,37.3 47.3,37.3 47.3,28.7 38.7,28.7
GND on Top Layer "Top Layer-GND" (solid, pour order 6): 0,80 100,80 100,0 0,0
CURRENT_SENSOR on Top Layer "Top Layer-CURRENT_SENSOR" (solid, pour order 2): 41.08,53.5 36.08,53.5 36.08,59.9 41.08,59.9
MOTOR_OUT1 on Top Layer "Top Layer-MOTOR_OUT1" (solid, pour order 0): 36,66.5 41,66.5 41,60.1 36,60.1
GND on Bottom Layer "Bottom Layer-GND" (solid, pour order 8): 0,80 100,80 100,0 0,0

## Keep-outs
Keep-Out Layer:
  the board outline again, w1

## Silkscreen, mask and mechanical layers (free items; w line width, h text height)
Top Overlay:
  circle w0.254: c36.7,61.9 r0.224
  circle w0.254: c48.1,65.7 r0.224
  lines w0.254: 20.6,76 20.6,75.1 21.5,74.2 29.9,74.2 ; 24.7,60.7 25.3,60.1 ; 25.9,60.7 25.3,60.1 ; 26.2,65.4 26.2,62.2 25.3,63.1 25.3,60.1 ; 29,73.3 29.9,74.2 ; 29,75.1 29.9,74.2 ; 53.2,5.4 52.3,6.3 ; 53.2,7.2 52.3,6.3 ; 61.6,8.1 61.6,7.2 60.7,6.3 52.3,6.3 ; 64.8,3.8 64.8,4.7 65.7,5.6 74.1,5.6 ; 73.2,4.7 74.1,5.6 ; 73.2,6.5 74.1,5.6 ; 94.5,24 95.1,23.4 ; 95.7,24 95.1,23.4 ; 96,28.7 96,25.5 95.1,26.4 95.1,23.4 ; 29.9,74.2 29.9,74.2 ; 52.3,6.3 52.3,6.3 ; 74.1,5.6 74.1,5.6
  text "MOT2" at 29.7,69.1 h1.52
  text "MOT1" at 38,69 h1.52
  text "DANGER: / HIGH CURRENT / HIGH HEAT" at 34,47.8 h1.52 r90
  text "DANGER: / HIGH CURRENT / HIGH HEAT" at 75.5,22.7 h1.52
  text "MOSI" at 44.56,13.1 h0.7 r270
  text "MISO" at 47.1,13.1 h0.7 r270
  text "+5V" at 49.64,13.1 h0.7 r270
  text "ENCA" at 25,12.8 h1 r90
  text "ENCB" at 28.5,12.8 h1 r90
  text "NC" at 32,12.7 h1 r90
  text "GND" at 35.5,12.7 h1 r90
  text "+5V" at 19.4,10.9 h1 r90
  text "+12V" at 78.2,9.2 h1.52 r90
  text "GND" at 83.28,9.2 h1.52 r90
  text "GND" at 45.28,2.36 h0.7 r90
  text "RST" at 47.82,2.36 h0.7 r90
  text "SCK" at 50.36,2.36 h0.7 r90
Bottom Overlay:
  text "MSE312 | SUMMER 2020 | GROUP 7 / OPEN-SOURCE SIMULATOR STEERING WHEEL / REV. A" at 9,67 h1.52 r90
  text "Dmitrii Gusev, 301297008 / Harsimranjeet Singh, 301289434 / Aldiyar Mataibay, 301326130" at 98.6,11.2 h1.52